# EAGLE board TinKerCad_Simulation (EAGLE 9.7.0)

Size 260.38 x 137.68 mm. Coordinates in mm from the lower left corner, seen from the top.
Outline: 0,0 260.38,0 260.38,137.68 0,137.68 0,0
Copper layers (1*16): Top 0.035mm / dielectric 1.5mm / Bottom 0.035mm
Design rules "default": minimum track width 6mil, minimum drill 0.35mm, track to track 6mil, track to pad 6mil, pad to pad 6mil, via to via 6mil, smd to smd 6mil, copper to edge 40mil, drill to drill 6mil, minimum pad ring 10mil, minimum via ring 8mil, stop-mask expansion 4mil, vias tented up to drill 0mil, thermal gap 10mil

## Footprints (pad centres in the part's own frame; a part is rotated, then mirrored left to right if it is on the bottom)
PIEZO = drill 1 pad 1.6: 1 -3.5,0; 2 3.5,0
28015 = drill 1.016 long: 1 -2.54,0; 2 0,0; 3 2.54,0
RESAD1016W63L850D250B = drill 0.83 pad 1.43: 1 -5.08,0; 2 5.08,0
HA-06-SM065 = drill 1 pad 1.676: 1 -2.54,-2.54; 2 0,2.54; 3 2.54,-2.54
SWITCH-MOMENTARY-PTH-6.5MM = drill 1.016 pad 1.88: 1 -3.251,2.261; 2 3.251,2.261; 3 -3.251,-2.261; 4 3.251,-2.261
78F01T = drill 0.8: 1 -1.27,-3.81; 2 1.27,-3.81; 3 1.27,3.81; 4 -1.27,3.81
ARDUINO-UNO-R3-SHIELD = drill 1.016 pad 1.88: 3.3V 24.13,-2.54; 5V 24.13,0; A0 24.13,12.7; A1 24.13,15.24; A2 24.13,17.78; A3 24.13,20.32; A4 24.13,22.86; A5 24.13,25.4; AREF -24.13,-13.97; D2 -24.13,20.32; D3 -24.13,17.78; D4 -24.13,15.24; D5 -24.13,12.7; D6 -24.13,10.16; D7 -24.13,7.62; D8 -24.13,3.81; D9 -24.13,1.27; D10 -24.13,-1.27; D11 -24.13,-3.81; D12 -24.13,-6.35; D13 -24.13,-8.89; GND@0 24.13,2.54; GND@1 24.13,5.08; GND@2 -24.13,-11.43; IOREF 24.13,-7.62; NC 24.13,-10.16; RES 24.13,-5.08; RX -24.13,25.4; SCL -24.13,-19.05; SDA -24.13,-16.51; TX -24.13,22.86; VIN 24.13,7.62
JHD-162A = drill 1.016 long: 1 -19.05,0; 2 -16.51,0; 3 -13.97,0; 4 -11.43,0; 5 -8.89,0; 6 -6.35,0; 7 -3.81,0; 8 -1.27,0; 9 1.27,0; 10 3.81,0; 11 6.35,0; 12 8.89,0; 13 11.43,0; 14 13.97,0; 15 16.51,0; 16 19.05,0

## Placement (x,y rotation side)
PIEZO1  PIEZO  [PIEZO]  27.81,30.54 0 top
PING1  DISTANCE-SENSOR-3PIN  [28015]  183.46,14.87 0 top
PING2  DISTANCE-SENSOR-3PIN  [28015]  183.37,43.99 0 top
PING3  DISTANCE-SENSOR-3PIN  [28015]  234.35,44.13 0 top
PINGWATER_LEVEL_SENSOR_  DISTANCE-SENSOR-3PIN  [28015]  234.09,14.61 0 top
R3  270  [RESAD1016W63L850D250B]  33.88,84.52 270 top
RPOT1  250k  [HA-06-SM065]  51.94,33.08 0 top
RPOT2  250k  [HA-06-SM065]  22.13,91.04 180 top
RPOT3  250k  [HA-06-SM065]  69.72,33.08 0 top
S1  SWITCH_MOMENTARY  [SWITCH-MOMENTARY-PTH-6.5MM]  105.01,119.24 90 top
S2  SWITCH_MOMENTARY  [SWITCH-MOMENTARY-PTH-6.5MM]  95.92,107.49 90 top
S3  SWITCH_MOMENTARY  [SWITCH-MOMENTARY-PTH-6.5MM]  105.47,107.28 90 top
S4  SWITCH_MOMENTARY  [SWITCH-MOMENTARY-PTH-6.5MM]  96.11,119.16 90 top
SW1  DPST78F01T  [78F01T]  209.59,9.69 0 top
U1  ARDUINO-UNO-R3-SHIELD  [ARDUINO-UNO-R3-SHIELD]  126.51,41.89 270 top
U2  LCD-16X2JHD-162A  [JHD-162A]  30.73,130.13 0 top

## Library data of the parts
PIEZO1 PING1-PING3 PINGWATER_LEVEL_SENSOR_ R3 RPOT1-RPOT3 S1-S4 SW1 U1 U2 = Tinkercad

## Nets
U1_5V: PING1.2 PING2.2 PING3.2 PINGWATER_LEVEL_SENSOR_.2 R3.2 RPOT1.1 RPOT2.3 RPOT3.1 U1.5V U2.2
U1_A0: PIEZO1.1 U1.A0
U1_A1: PING3.3 U1.A1
U1_A2: PING2.3 U1.A2
U1_A3: SW1.4 U1.A3
U1_A4: RPOT1.2 U1.A4
U1_A5: RPOT3.2 U1.A5
U1_D2: PING1.3 U1.D2
U1_D3: PINGWATER_LEVEL_SENSOR_.3 U1.D3
U1_D4: S1.3 U1.D4
U1_D5: S4.3 U1.D5
U1_D6: S3.3 U1.D6
U1_D7: S2.3 U1.D7
U1_D8: U1.D8 U2.6
U1_D9: U1.D9 U2.4
U1_D10: U1.D10 U2.14
U1_D11: U1.D11 U2.13
U1_D12: U1.D12 U2.12
U1_D13: U1.D13 U2.11
U1_GND: PIEZO1.2 PING1.1 PING2.1 PING3.1 PINGWATER_LEVEL_SENSOR_.1 RPOT1.3 RPOT2.1 RPOT3.3 S1.2 S2.2 S3.2 S4.2 SW1.1 U1.GND@0 U1.GND@1 U1.GND@2 U2.1 U2.5 U2.16
U2_LED+: R3.1 U2.15
U2_VO: RPOT2.2 U2.3

## Tracks (layer width: path | path; a pad name or v marks a point on that pad's centre or on a via)
U1_5V  (9 unrouted)
U1_A0  (1 unrouted)
U1_A1  (1 unrouted)
U1_A2  (1 unrouted)
U1_A3  (1 unrouted)
U1_A4  (1 unrouted)
U1_A5  (1 unrouted)
U1_D2  (1 unrouted)
U1_D3  (1 unrouted)
U1_D4  (1 unrouted)
U1_D5  (1 unrouted)
U1_D6  (1 unrouted)
U1_D7  (1 unrouted)
U1_D8  (1 unrouted)
U1_D9  (1 unrouted)
U1_D10  (1 unrouted)
U1_D11  (1 unrouted)
U1_D12  (1 unrouted)
U1_D13  (1 unrouted)
U1_GND  (18 unrouted)
U2_LED+  (1 unrouted)
U2_VO  (1 unrouted)